# EAGLE board USBASP (EAGLE 9.6.2)
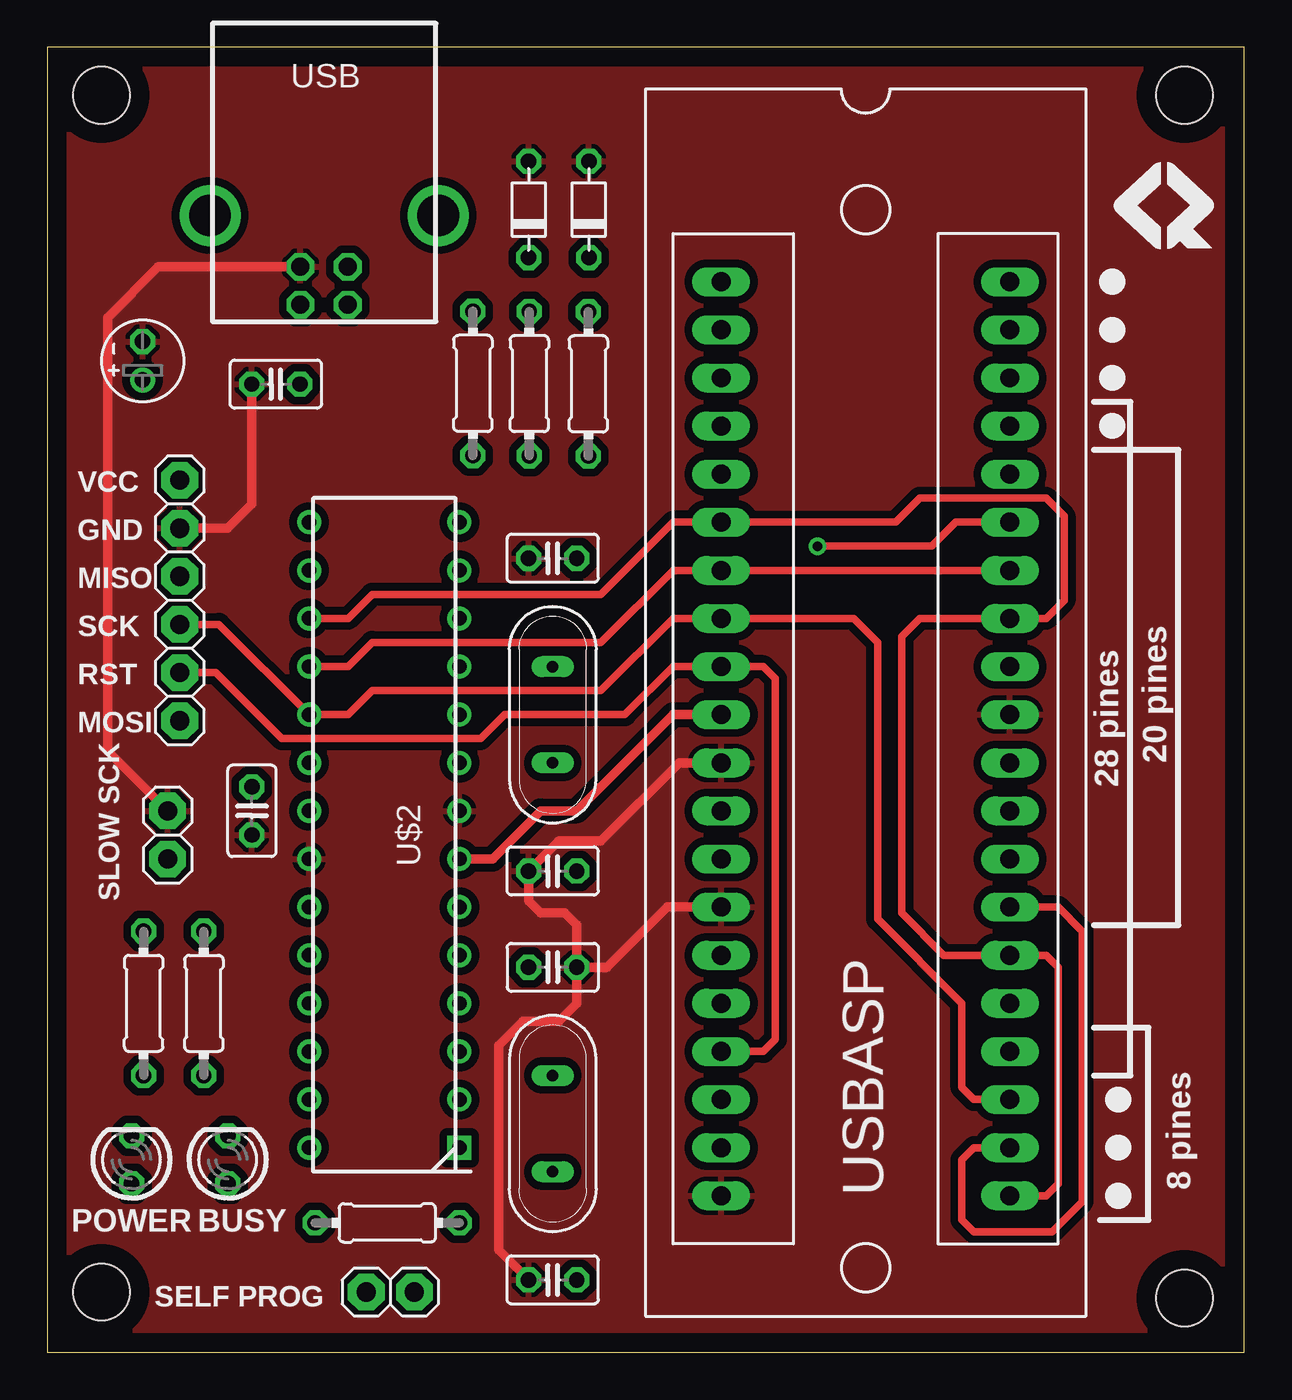
[diagram p0: board, top side]
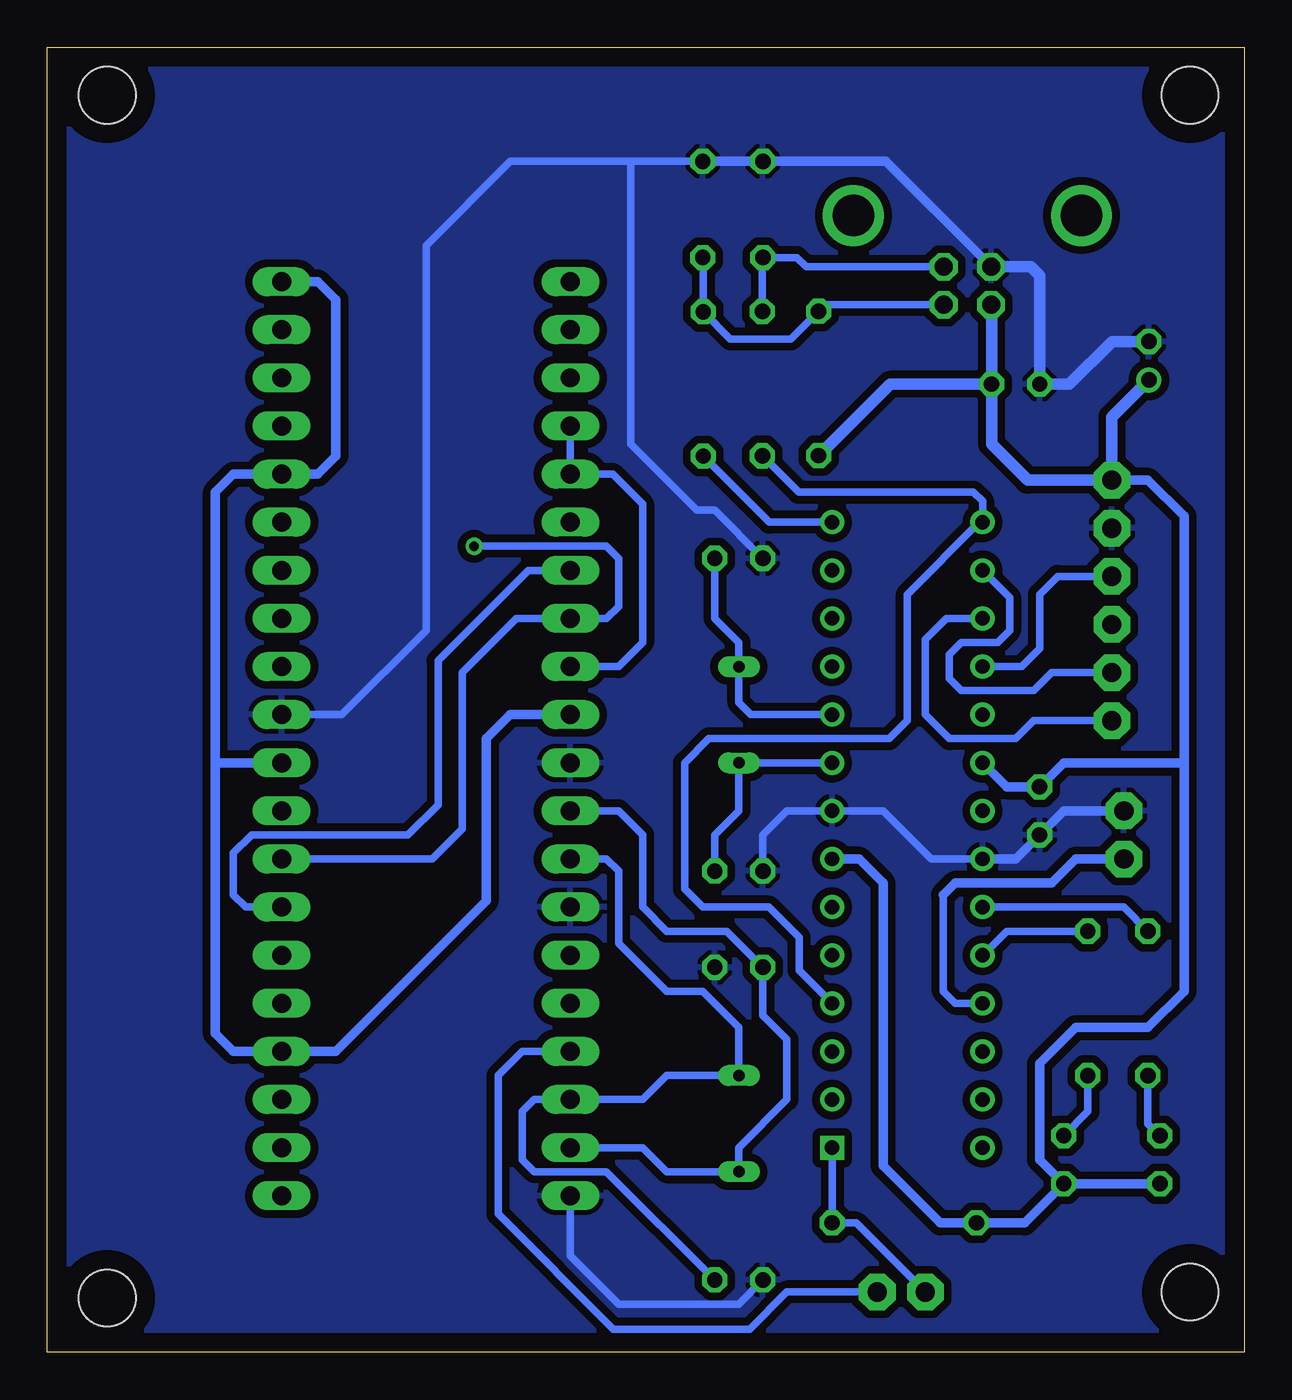
[diagram p1: board, bottom side, seen from below]

Size 63.16 x 68.89 mm. Coordinates in mm from the lower left corner, seen from the top.
Outline: 0,0 63.16,0 63.16,68.89 0,68.89 0,0
Copper layers (1*16): Top 0.035mm / dielectric 1.5mm / Bottom 0.035mm
Design rules "default": minimum track width 6mil, minimum drill 0.35mm, track to track 6mil, track to pad 6mil, pad to pad 6mil, via to via 6mil, smd to smd 6mil, copper to edge 40mil, drill to drill 6mil, minimum pad ring 10mil, minimum via ring 8mil, stop-mask expansion 4mil, vias tented up to drill 0mil, thermal gap 10mil
Holes 3 mm at 2.86,3.17 60.01,2.86 60.01,66.36 2.86,66.36

## Footprints (pad centres in the part's own frame; a part is rotated, then mirrored left to right if it is on the bottom)
C025-025X050 = drill 0.813 octagon: 1 -1.27,0; 2 1.27,0
E2-4 = drill 0.813 pad 1.27: + -1.016,0 | drill 0.813 pad 1.27 octagon: - 1.016,0
USB_TYPEB = drill 0.95 octagon: 1 1.25,4.71; 2 -1.25,4.71; 3 -1.25,2.71; 4 1.25,2.71 | drill 2.2: P$1 -6.02,0; P$2 6.02,0
ZENER_1A = drill 0.813 octagon: A 2.54,0; C -2.54,0
LED3MM_GREEN = drill 0.813 octagon: A -1.27,0; K 1.27,0
LED3MM_RED = drill 0.813 octagon: A -1.27,0; K 1.27,0
1X02 = drill 1.016 pad 1.93 octagon: 1 -1.27,0; 2 1.27,0
1X06 = drill 1.016 pad 1.93 octagon: 1 -6.35,0; 2 -3.81,0; 3 -1.27,0; 4 1.27,0; 5 3.81,0; 6 6.35,0
QS = drill 0.61 long: 1 -2.54,0; 2 2.54,0
0204/7 = drill 0.813 octagon: 1 -3.81,0; 2 3.81,0
DIL40 = drill 1 pad 1.524 long: 1 -24.13,-7.62; 2 -21.59,-7.62; 3 -19.05,-7.62; 4 -16.51,-7.62; 5 -13.97,-7.62; 6 -11.43,-7.62; 7 -8.89,-7.62; 8 -6.35,-7.62; 9 -3.81,-7.62; 10 -1.27,-7.62; 11 1.27,-7.62; 12 3.81,-7.62; 13 6.35,-7.62; 14 8.89,-7.62; 15 11.43,-7.62; 16 13.97,-7.62; 17 16.51,-7.62; 18 19.05,-7.62; 19 21.59,-7.62; 20 24.13,-7.62; 21 24.13,7.62; 22 21.59,7.62; 23 19.05,7.62; 24 16.51,7.62; 25 13.97,7.62; 26 11.43,7.62; 27 8.89,7.62; 28 6.35,7.62; 29 3.81,7.62; 30 1.27,7.62; 31 -1.27,7.62; 32 -3.81,7.62; 33 -6.35,7.62; 34 -8.89,7.62; 35 -11.43,7.62; 36 -13.97,7.62; 37 -16.51,7.62; 38 -19.05,7.62; 39 -21.59,7.62; 40 -24.13,7.62
DIP28 = drill 0.759 pad 1.159 square: 1 -3.969,16.51 | drill 0.759 pad 1.159: 2 -3.969,13.97; 3 -3.969,11.43; 4 -3.969,8.89; 5 -3.969,6.35; 6 -3.969,3.81; 7 -3.969,1.27; 8 -3.969,-1.27; 9 -3.969,-3.81; 10 -3.969,-6.35; 11 -3.969,-8.89; 12 -3.969,-11.43; 13 -3.969,-13.97; 14 -3.969,-16.51; 15 3.969,-16.51; 16 3.969,-13.97; 17 3.969,-11.43; 18 3.969,-8.89; 19 3.969,-6.35; 20 3.969,-3.81; 21 3.969,-1.27; 22 3.969,1.27; 23 3.969,3.81; 24 3.969,6.35; 25 3.969,8.89; 26 3.969,11.43; 27 3.969,13.97; 28 3.969,16.51

## Placement (x,y rotation side)
C1  0.1uF  [C025-025X050]  12.06,51.1 180 top
C2  4.7uF/16V  [E2-4]  5.03,52.34 90 top
C3  22pF  [C025-025X050]  26.67,25.4 180 top
C4  22pF  [C025-025X050]  26.67,41.91 180 top
C5  0.1uF  [C025-025X050]  10.79,28.57 270 top
C6  22pF  [C025-025X050]  26.67,3.81 180 top
C7  22pF  [C025-025X050]  26.67,20.32 0 top
CONN1  USB_TYPEB  [USB_TYPEB]  14.61,60.01 180 top
D1  3.6V  [ZENER_1A]  25.4,60.33 90 top
D2  3.6V  [ZENER_1A]  28.57,60.33 90 top
D3  RED  [LED3MM_GREEN]  9.53,10.16 90 top
D4  GREEN  [LED3MM_RED]  4.45,10.16 90 top
JP1  [1X02]  6.35,27.3 90 top
JP2  [1X06]  6.99,39.69 270 top
JP3  [1X02]  18.1,3.17 0 top
Q1  [QS]  26.67,33.66 90 top
Q2  [QS]  26.67,12.06 270 top
R1  2.2K  [0204/7]  22.46,51.14 90 top
R2  68  [0204/7]  28.55,51.12 90 top
R3  68  [0204/7]  25.43,51.13 90 top
R4  10K  [0204/7]  17.94,6.83 180 top
R5  1K  [0204/7]  8.26,18.41 270 top
R6  1K  [0204/7]  5.08,18.41 270 top
U$1  AVR-40-ZIF  [DIL40]  43.18,32.38 270 top
U$2  ATMEGA328P_DIP  [DIP28]  17.78,27.3 180 top

## Library data of the parts
C1 C3-C7 = CQ_CAPACITOR
C2 = rcl; SPICEPREFIX: C
CONN1 = CQ_USB
D1 D2 = CQ_DIODE
D3 D4 = CQ_LED
JP1-JP3 = pinhead_carlos
Q1 Q2 = special
R1-R6 = rcl; SPICEPREFIX: R
U$1 = CARLOS_2019_ULTIMO
U$2 = CQ_ATMEL_AVR

## Nets
D+: R3.1 U$2.4 U$2.15
D-: R2.1 U$2.14
GND: C1.2 C2.- C3.2 C4.2 C5.2 C6.2 C7.2 CONN1.4 D1.A D2.A JP1.2 JP2.2 U$1.11 U$1.14 U$1.20 U$1.31 U$2.8 U$2.22
MISO: JP2.3 U$1.7 U$1.22 U$1.27 U$1.34 U$2.18
MOSI: JP2.6 U$1.6 U$1.21 U$1.26 U$1.33 U$2.17
N$1: JP3.1 R4.1 U$2.1
N$3: R6.1 U$2.23
N$4: R5.1 U$2.24
N$5: D3.K R5.2
N$6: D4.K R6.2
N$8: CONN1.2 D2.C R1.2 R2.2
N$9: CONN1.3 D1.C R3.2
N$10: C3.1 Q1.1 U$2.9
N$11: C4.1 Q1.2 U$2.10
RESET: JP2.5 JP3.2 U$1.4 U$1.5 U$1.9 U$1.17 U$2.16
SCK: JP2.4 U$1.8 U$1.23 U$1.28 U$1.35 U$2.19
SLOW_SCK: JP1.1 U$2.25
VCC: C1.1 C2.+ C5.1 CONN1.1 D3.A D4.A JP2.1 R1.1 R4.2 U$1.10 U$1.24 U$1.30 U$1.36 U$1.40 U$2.7 U$2.20
XTAL1: C6.1 Q2.1 U$1.13 U$1.18
XTAL2: C7.1 Q2.2 U$1.12 U$1.19

## Tracks (layer width: path | path; a pad name or v marks a point on that pad's centre or on a via)
D+
  Bottom 0.406: R3.1 23.51,45.4 14.29,45.4 13.81,44.93 U$2.15 13.97,43.81 17.78,40.01 17.78,33.34 18.73,32.38 28.26,32.38 29.53,31.11 29.53,24.45 28.57,23.5 25.08,23.5 23.5,21.91 23.5,20.16 U$2.4
D-
  Bottom 0.406: U$2.14 25.06,43.81 R2.1
GND
  Top 0.406: C1.2
  Top 0.508: JP1.2 3.17,31.75 3.17,54.61 5.86,57.3 CONN1.4 | C7.2 27.94,22.54 27.3,23.18 26.04,23.18 25.4,23.81 C3.2 26.99,26.99 29.21,26.99 33.34,31.11 U$1.11 | C6.2 23.81,5.4 23.81,16.19 25.08,17.46 26.99,17.46 27.94,18.41 C7.2 | U$1.14 32.7,23.5 29.53,20.32 C7.2 | JP2.2 9.53,43.5 10.79,44.77 C1.2
  Bottom 0.406: U$2.22 16.51,26.04 19.05,28.57 U$2.8 24.13,28.57 25.4,27.3 C3.2 | D2.A 32.38,62.87 | 32.38,62.87 38.73,62.87 43.18,58.42 43.18,38.1 47.62,33.66 U$1.31 | C4.2 27.94,44.45 28.89,44.45 32.38,47.94 32.38,62.87 | C6.2 26.67,2.54 33.02,2.54 35.56,5.08 U$1.20
  Bottom 0.508: JP1.2 9.53,28.57 C5.2 12.06,26.04 U$2.22 | CONN1.4 18.92,62.87 D1.A D2.A
  Bottom 0.61: CONN1.4 11.26,57.3 10.79,56.83 C1.2 9.22,51.1 6.97,53.35 C2.-
  pour Top (isolate 0.406): 0,68.9 63.18,68.9 63.18,0 0,0
  pour Bottom (isolate 0.406): 0,68.9 63.18,68.9 63.18,0 0,0
MISO
  Top 0.406: U$2.18 15.88,36.2 17.14,37.47 29.21,37.47 33.02,41.27 U$1.7 U$1.34 | U$1.22 48.9,10.79 48.26,10.16 48.26,6.99 48.9,6.35 53.02,6.35 54.61,7.94 54.61,22.23 53.34,23.5 U$1.27
  Bottom 0.406: U$1.7 37.78,41.27 42.55,36.51 42.55,28.89 44.13,27.3 52.39,27.3 53.34,26.35 53.34,24.13 52.7,23.5 U$1.27 | U$2.18 11.75,36.2 10.79,37.15 10.79,40.01 9.84,40.96 JP2.3
MOSI
  Top 0.406: U$2.17 15.88,38.73 17.14,40.01 29.21,40.01 33.02,43.81 U$1.6 44.77,43.81 46.04,45.09 52.7,45.09 53.66,44.13 53.66,39.69 52.7,38.73 U$1.33 46.04,38.73 45.09,37.78 45.09,23.18 47.31,20.95 U$1.26 52.7,20.95 53.34,20.32 53.34,8.89 52.7,8.26 U$1.21
  Bottom 0.406: JP2.6 11.11,33.34 12.06,32.38 15.56,32.38 16.83,33.66 16.83,37.62 15.72,38.73 U$2.17
N$1
  Bottom 0.406: U$2.1 R4.1 | R4.1 | JP3.1 20.48,6.83 R4.1
N$3
  Bottom 0.406: R6.1 6.35,23.5 U$2.23
N$4
  Bottom 0.406: U$2.24 12.54,22.23 R5.1
N$5
  Bottom 0.406: R5.2 8.26,12.7 D3.K
N$6
  Bottom 0.406: R6.2 5.08,12.06 D4.K
N$8
  Bottom 0.406: D2.C 28.55,57.76 R2.2 27.11,53.49 23.92,53.49 R1.2 22.11,55.3 CONN1.2
N$9
  Bottom 0.406: R3.2 25.43,57.75 D1.C 23.62,57.79 23.12,57.3 CONN1.3
N$10
  Bottom 0.406: U$2.9 Q1.1 26.67,28.57 27.94,27.3 C3.1
N$11
  Bottom 0.406: C4.1 27.94,38.73 26.67,37.47 Q1.2 26.67,34.29 26.04,33.66 U$2.10
RESET
  Top 0.406: U$1.17 37.78,15.88 38.42,16.51 38.42,35.56 37.78,36.2 U$1.9 33.02,36.2 30.48,33.66 24.13,33.66 22.86,32.38 12.38,32.38 8.89,35.88 JP2.5
  Bottom 0.406: U$1.4 U$1.5 33.34,46.35 31.75,44.77 31.75,37.47 33.02,36.2 U$1.9 | U$2.16 12.38,39.85 12.38,38.1 13.02,37.47 14.92,37.47 15.56,36.83 15.56,35.56 14.92,34.92 11.11,34.92 10.16,35.88 JP2.5 | JP3.2 24.13,3.17 26.09,1.22 33.29,1.22 39.37,7.3 39.37,14.61 38.1,15.88 U$1.17
SCK  (via drill 0.5)
  Top 0.406: v40.64,42.55 46.67,42.55 47.94,43.81 U$1.35 | U$1.23 48.9,13.34 48.26,13.97 48.26,18.41 43.81,22.86 43.81,37.47 42.55,38.73 U$1.8 33.02,38.73 29.21,34.92 17.14,34.92 15.88,33.66 U$2.19 9.05,38.42 JP2.4
  Bottom 0.406: U$1.28 42.86,26.04 41.27,27.62 41.27,35.88 38.42,38.73 U$1.8 33.66,38.73 33.02,39.37 33.02,41.91 33.66,42.55 v40.64,42.55
SLOW_SCK
  Bottom 0.406: U$2.25 15.24,18.41 15.88,19.05 15.88,24.13
  Bottom 0.508: 15.88,24.13 15.24,24.77 10.16,24.77 8.89,26.04 JP1.1
VCC
  Top 0.508: U$2.7 23.5,26.04 26.04,28.57 27.94,28.57 33.02,33.66 U$1.10
  Bottom 0.508: D3.A D4.A | D3.A 11.59,6.83 R4.2 16.03,6.83 19.05,9.84 19.05,24.77 20.32,26.04 U$2.7 | D3.A 10.79,10.16 10.79,15.24 8.89,17.14 5.08,17.14 3.17,19.05 3.17,31.11 | U$2.20 12.54,29.84 C5.1 9.53,31.11 3.17,31.11 | U$1.40 48.9,56.52 47.94,55.56 47.94,47.31 48.9,46.35 U$1.36 53.34,46.35 54.29,45.4 54.29,31.11 | 54.29,31.11 54.29,16.83 53.34,15.88 U$1.24 47.94,15.88 40.01,23.81 40.01,32.38 38.73,33.66 U$1.10 | U$1.30 54.29,31.11 | JP2.1 5.08,46.04 3.17,44.13 3.17,31.11
  Bottom 0.61: C1.1 18.69,51.1 R1.1 | C1.1 13.33,55.27 CONN1.1 | C2.+ 6.99,49.37 JP2.1 11.43,46.04 13.34,47.94 C1.1
XTAL1
  Bottom 0.406: U$1.13 33.66,26.04 33.02,25.4 33.02,21.59 30.48,19.05 28.57,19.05 26.67,17.14 Q2.1 30.48,14.61 31.75,13.34 U$1.18 37.47,13.34 38.1,12.7 38.1,10.16 37.47,9.53 33.66,9.53 C6.1
XTAL2
  Bottom 0.406: U$1.19 31.75,10.79 30.48,9.53 Q2.2 26.67,10.79 24.13,13.34 24.13,16.51 25.4,17.78 C7.1 27.3,22.23 30.48,22.23 31.75,23.5 31.75,27.3 33.02,28.57 U$1.12

## Text on the board
tPlace: VCC | GND | MISO | SCK | RST | MOSI | SLOW SCK | USBASP | POWER | BUSY | SELF PROG
tNames: 20 pines | 28 pines | 8 pines | C:/Users/carlo/Pictures/logo2020_monocromatico.bmp
200bmp: C:/Users/carlo/Pictures/logo2020_monocromatico.bmp